# EAGLE board Central_MABOS (EAGLE 9.7.0)
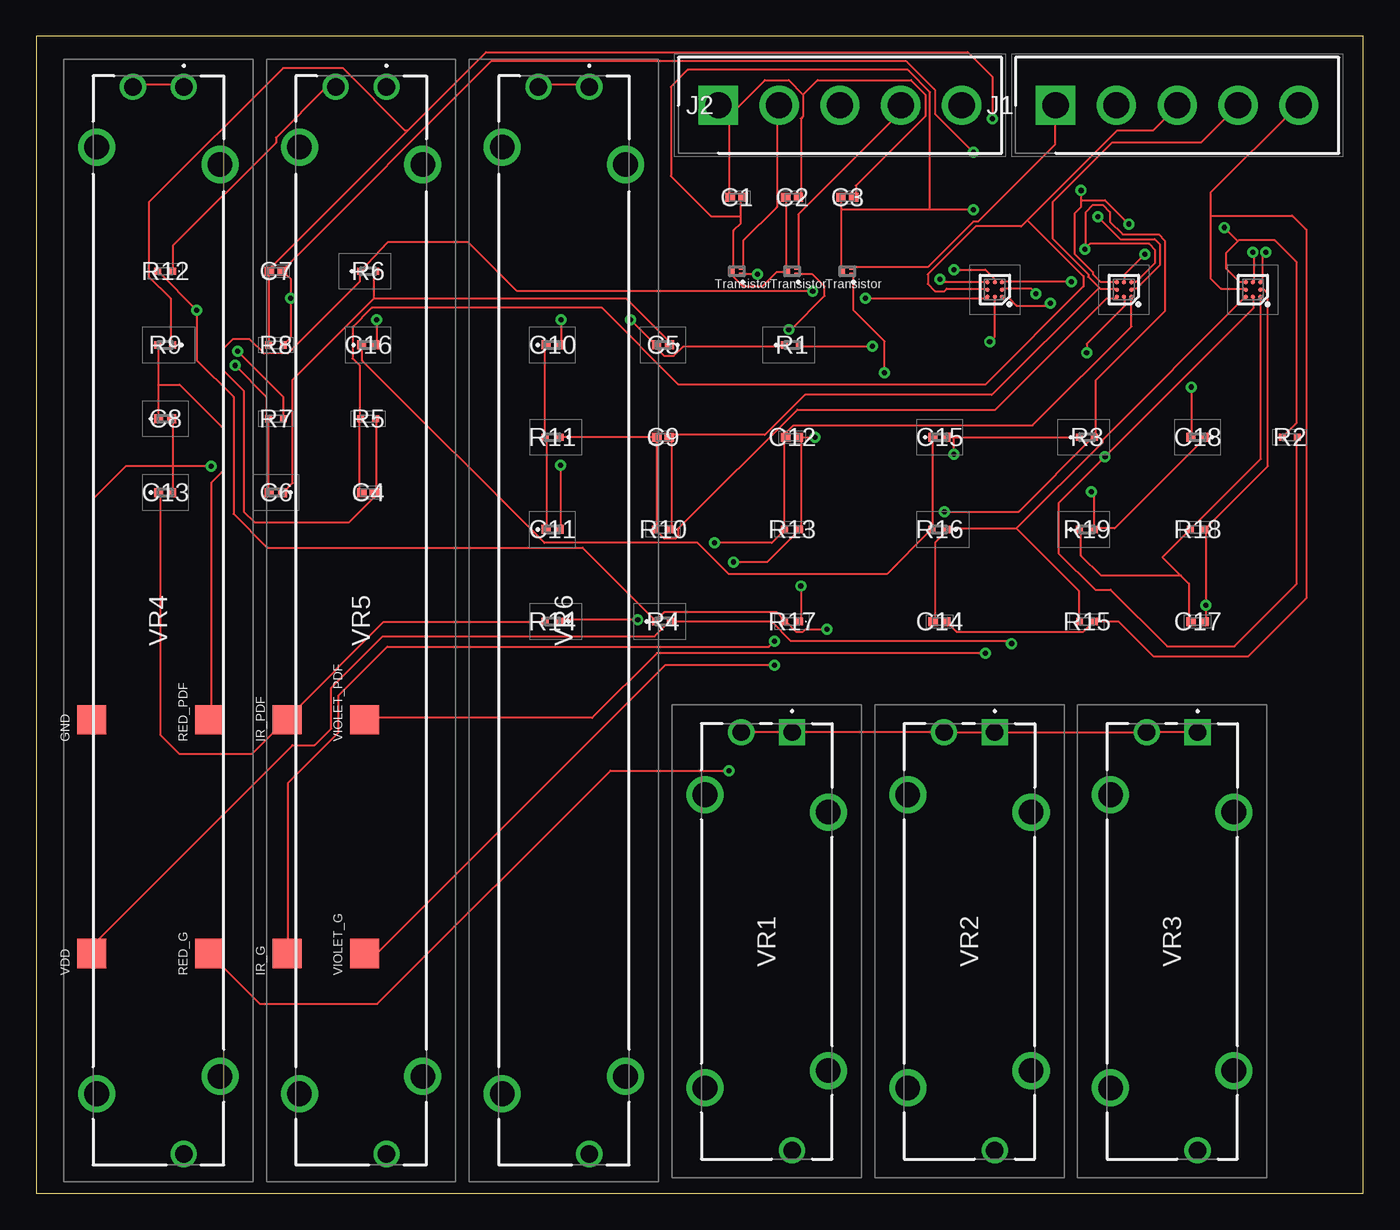
[diagram p0: board, top side]
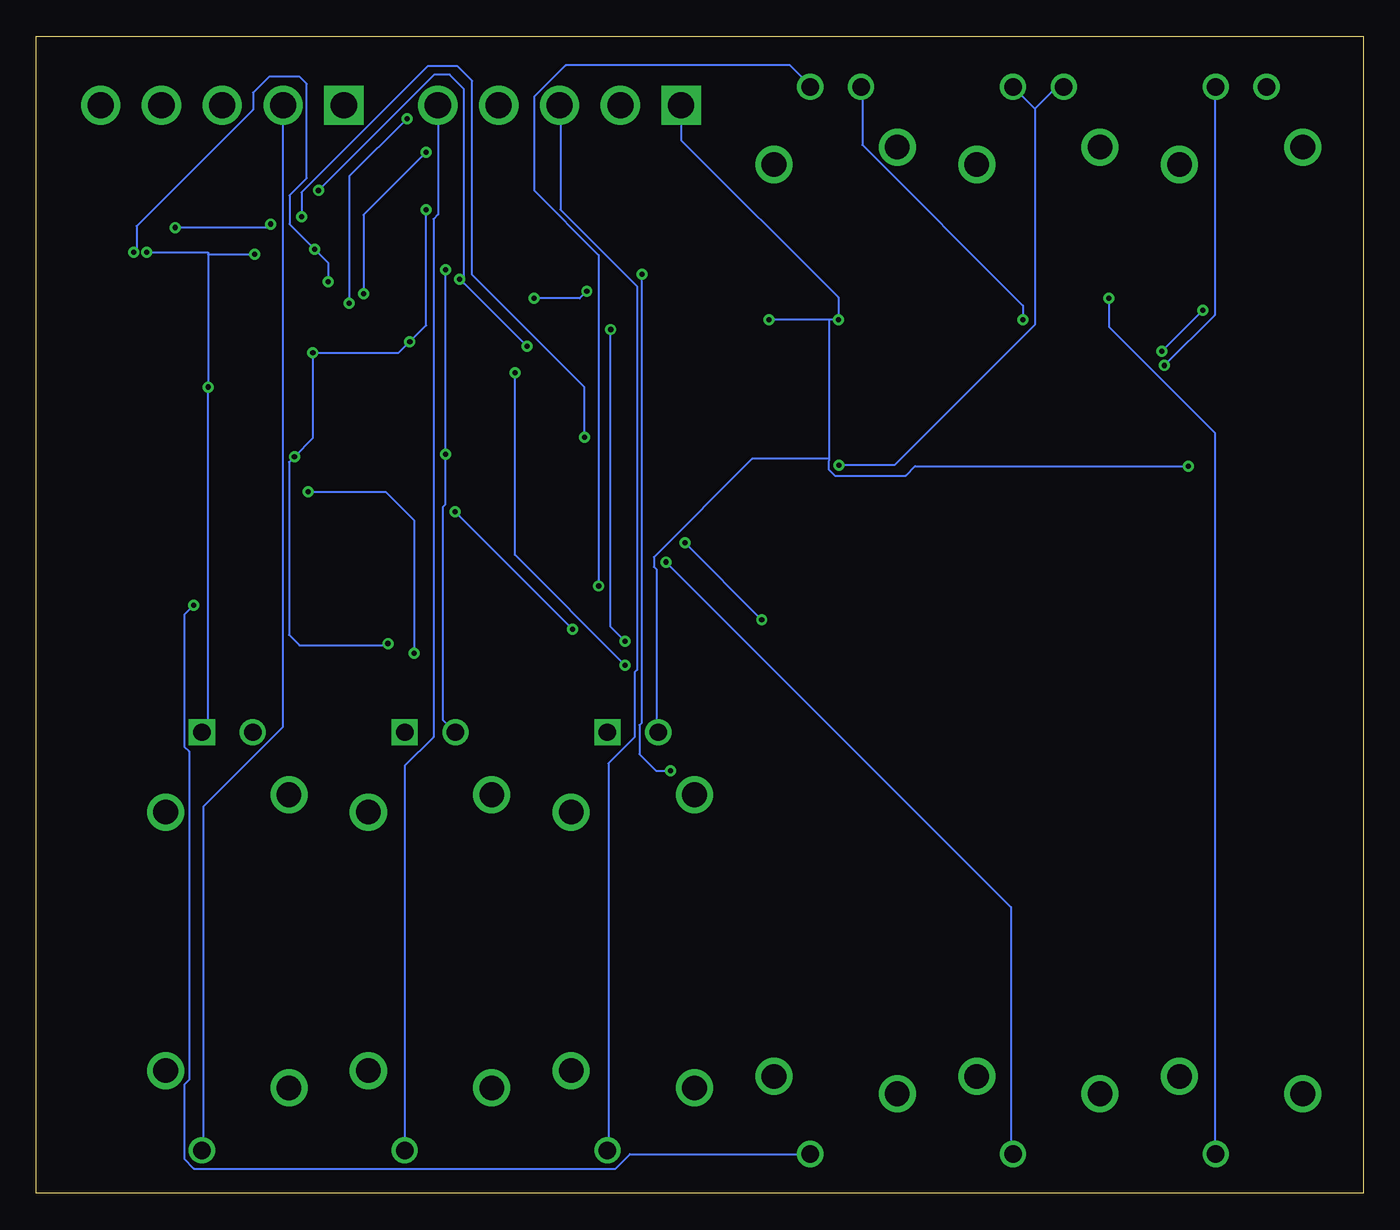
[diagram p1: board, bottom side, seen from below]

Size 91.42 x 79.68 mm. Coordinates in mm from the lower left corner, seen from the top.
Outline: 0,0 91.42,0 91.42,79.68 0,79.68 0,0
Copper layers (1*16): Top 0.035mm / dielectric 1.5mm / Bottom 0.035mm
Design rules "default *": minimum track width 6mil, minimum drill 0.35mm, track to track 7mil, track to pad 8mil, pad to pad 6mil, via to via 6mil, smd to smd 6mil, copper to edge 40mil, drill to drill 6mil, minimum pad ring 10mil, minimum via ring 8mil, stop-mask expansion 4mil, vias tented up to drill 0mil, thermal gap 10mil

## Footprints (pad centres in the part's own frame; a part is rotated, then mirrored left to right if it is on the bottom)
CAPC1005X55N = smd 0.65 x 0.62: 1 -0.44,0; 2 0.44,0
C0402 = smd 0.62 x 0.62: 1 -0.45,0; 2 0.45,0
PAD = smd 2 x 2: PAD 0,0
BGA8C50P3X3_142X142X65 = smd 0.306 x 0.306: A1 -0.5,0.5; A2 0,0.5; A3 0.5,0.5; B1 -0.5,0; B3 0.5,0; C1 -0.5,-0.5; C2 0,-0.5; C3 0.5,-0.5
SHDR5W114P0X419_1X5_2228X658X1 = drill 1.8 pad 2.7 square: 1 0,0 | drill 1.8 pad 2.7: 2 4.19,0; 3 8.38,0; 4 12.57,0; 5 16.76,0
SOT883B = smd 0.4 x 0.25: 1 -0.35,0.225; 2 -0.35,-0.225 | smd 0.4 x 0.7: 3 0.35,0
ERJPA2_(0402) = smd 0.475 x 0.5: 1 -0.512,0; 2 0.512,0
ERJ2RKD1004X = smd 0.475 x 0.5: 1 -0.512,0; 2 0.512,0
POTENTIOMETER = drill 1.2 pad 1.8 square: 1 0,0 | drill 1.2 pad 1.8: 2 0,-3.5; 3 28.8,0 | drill 1.7 pad 2.55: MH1 4.3,-6; MH2 24.5,-6; MH3 23.3,2.5; MH4 5.5,2.5
PTA60432015DPB254 = drill 1.2 pad 1.8: 1 0,0; 2 0,-3.5; 3 73.5,0 | drill 1.7 pad 2.55: MH1 5.35,2.5; MH2 68.15,2.5; MH3 4.15,-6; MH4 69.35,-6

## Placement (x,y rotation side)
C1  CAPACITOR-12PF  [CAPC1005X55N]  48.26,68.58 0 top
C2  CAPACITOR-12PF  [CAPC1005X55N]  52.07,68.58 180 top
C3  CAPACITOR-12PF  [CAPC1005X55N]  55.88,68.58 180 top
C4  CAPACITOR-270PF  [CAPC1005X55N]  22.86,48.26 0 top
C5  CAPACITOR-10µF  [C0402]  43.18,58.42 180 top
C6  CAPACITOR-3.3µF  [C0402]  16.51,48.26 180 top
C7  CAPACITOR-5600PF  [CAPC1005X55N]  16.51,63.5 180 top
C8  CAPACITOR-10µF  [C0402]  8.89,53.34 0 top
C9  CAPACITOR-270PF  [CAPC1005X55N]  43.18,52.07 180 top
C10  CAPACITOR-10µF  [C0402]  35.56,58.42 0 top
C11  CAPACITOR-3.3µF  [C0402]  35.56,45.72 0 top
C12  CAPACITOR-5600PF  [CAPC1005X55N]  52.07,52.07 180 top
C13  CAPACITOR-10µF  [C0402]  8.89,48.26 0 top
C14  CAPACITOR-270PF  [CAPC1005X55N]  62.23,39.37 180 top
C15  CAPACITOR-10µF  [C0402]  62.23,52.07 0 top
C16  CAPACITOR-3.3µF  [C0402]  22.86,58.42 0 top
C17  CAPACITOR-5600PF  [CAPC1005X55N]  80.01,39.37 180 top
C18  CAPACITOR-10µF  [C0402]  80.01,52.07 180 top
GND  PAD  [PAD]  3.81,32.61 90 top
IC1  ADA4505-2  [BGA8C50P3X3_142X142X65]  66.04,62.23 180 top
IC2  ADA4505-2  [BGA8C50P3X3_142X142X65]  74.93,62.23 180 top
IC3  ADA4505-2  [BGA8C50P3X3_142X142X65]  83.82,62.23 180 top
IR_G  PAD  [PAD]  17.27,16.51 90 top
IR_PDF  PAD  [PAD]  17.27,32.61 90 top
J1  5PIN_CONNECTOR  [SHDR5W114P0X419_1X5_2228X658X1]  70.23,74.93 0 top
J2  5PIN_CONNECTOR  [SHDR5W114P0X419_1X5_2228X658X1]  46.99,74.93 0 top
Q1  TRANSISTOR  [SOT883B]  48.26,63.5 180 top
Q2  TRANSISTOR  [SOT883B]  52.07,63.5 180 top
Q3  TRANSISTOR  [SOT883B]  55.88,63.5 180 top
R1  RESISTOR-1.2KOHM  [ERJPA2_(0402)]  52.07,58.42 0 top
R2  RESISTOR-14KOHM  [ERJ2RKD1004X]  86.36,52.07 0 top
R3  RESISTOR-3.3KOHM  [ERJPA2_(0402)]  72.39,52.07 0 top
R4  RESISTOR-3.3KOHM  [ERJPA2_(0402)]  43.18,39.37 0 top
R5  RESISTOR-4.7MOHM  [ERJ2RKD1004X]  22.86,53.34 0 top
R6  RESISTOR-2.7KOHM  [ERJPA2_(0402)]  22.86,63.5 0 top
R7  RESISTOR-56KOHM  [ERJ2RKD1004X]  16.51,53.34 0 top
R8  RESISTOR-4.7MOHM  [ERJ2RKD1004X]  16.51,58.42 180 top
R9  RESISTOR-3.3KOHM  [ERJPA2_(0402)]  8.89,58.42 180 top
R10  RESISTOR-4.7MOHM  [ERJ2RKD1004X]  43.18,45.72 180 top
R11  RESISTOR-2.7KOHM  [ERJPA2_(0402)]  35.56,52.07 180 top
R12  RESISTOR-56KOHM  [ERJ2RKD1004X]  8.89,63.5 180 top
R13  RESISTOR-4.7MOHM  [ERJ2RKD1004X]  52.07,45.72 180 top
R14  RESISTOR-3.3KOHM  [ERJPA2_(0402)]  35.56,39.37 180 top
R15  RESISTOR-4.7MOHM  [ERJ2RKD1004X]  72.39,39.37 180 top
R16  RESISTOR-2.7KOHM  [ERJPA2_(0402)]  62.23,45.72 180 top
R17  RESISTOR-56KOHM  [ERJ2RKD1004X]  52.07,39.37 180 top
R18  RESISTOR-4.7MOHM  [ERJ2RKD1004X]  80.01,45.72 180 top
R19  RESISTOR-3.3KOHM  [ERJPA2_(0402)]  72.39,45.72 0 top
RED_G  PAD  [PAD]  11.94,16.51 90 top
RED_PDF  PAD  [PAD]  11.94,32.61 90 top
VDD  PAD  [PAD]  3.81,16.51 90 top
VIOLET_G  PAD  [PAD]  22.61,16.51 90 top
VIOLET_PDF  PAD  [PAD]  22.61,32.61 90 top
VR1  POTENTIOMETER_5K  [POTENTIOMETER]  52.07,31.75 270 top
VR2  POTENTIOMETER_5K  [POTENTIOMETER]  66.04,31.75 270 top
VR3  POTENTIOMETER_5K  [POTENTIOMETER]  80.01,31.75 270 top
VR4  POTENTIOMETER_250K  [PTA60432015DPB254]  10.16,76.2 270 top
VR5  POTENTIOMETER_250K  [PTA60432015DPB254]  24.13,76.2 270 top
VR6  POTENTIOMETER_250K  [PTA60432015DPB254]  38.1,76.2 270 top

## Library data of the parts
C1-C3 = MABOS_components; DESCRIPTION: Multilayer Ceramic Capacitors MLCC - SMD/SMT 12pF 2% 25V C0G; HEIGHT: 0.55mm; MANUFACTURER_NAME: Kemet; MANUFACTURER_PART_NUMBER: C0402C120G3GACTU; MOUSER_PART_NUMBER: 80-C0402C120G3G; MOUSER_PRICE-STOCK: https://www.mouser.com/Search/Refine.aspx?Keyword=80-C0402C120G3G
C4 C9 C14 = MABOS_components; DESCRIPTION: SMD Comm C0G, Ceramic, 270 pF, 2%, 50 VDC, 125 VDC, 125C, -55C, C0G, SMD, MLCC, Ultra-Stable, Low Loss, Class I, 0.1 % , 100 GOhms, 1.06 mg, 0402, 1mm, 0.5mm, 0.5mm, 0.3mm, 0.3mm, 10000, 78 Weeks, 120; HEIGHT: 0.55mm; MANUFACTURER_NAME: KEMET; MANUFACTURER_PART_NUMBER: C0402C271G5GACTU; MOUSER_PART_NUMBER: 80-C0402C271G5G; MOUSER_PRICE-STOCK: https://www.mouser.com/Search/Refine.aspx?Keyword=80-C0402C271G5G
C5 C8 C10 C13 C15 C18 = MABOS_components; DESCRIPTION: SMD Comm X5R, Ceramic, 10 uF, 20%, 6.3 VDC, 15.75 VDC, 85C, -55C, X5R, SMD, MLCC, Temperature Stable, Class II, 10 % , 10 MOhms, 1.41 mg, 0402, 1mm, 0.5mm, 0.5mm, 0.3mm, 0.3mm, 10000, 78 Weeks, 70; HEIGHT: 0.55mm; MANUFACTURER_NAME: KEMET; MANUFACTURER_PART_NUMBER: C0402C106M9PACTU; MOUSER_PART_NUMBER: 80-C0402C106M9P; MOUSER_PRICE-STOCK: https://www.mouser.co.uk/ProductDetail/KEMET/C0402C106M9PACTU?qs=x4XeXhDQKnp%252Bz0lMlwMC3A%3D%3D
C6 C11 C16 = MABOS_components; DESCRIPTION: SMD Comm X5R, Ceramic, 3.3 uF, 20%, 4 VDC, 10 VDC, 85C, -55C, X5R, SMD, MLCC, Temperature Stable, Class II, 10 % , 30.3 MOhms, 1.21 mg, 0402, 1mm, 0.5mm, 0.5mm, 0.3mm, 0.3mm, 10000, 78 Weeks, 70; HEIGHT: 0.55mm; MANUFACTURER_NAME: KEMET; MANUFACTURER_PART_NUMBER: C0402C335M7PACTU; MOUSER_PART_NUMBER: 80-C0402C335M7P; MOUSER_PRICE-STOCK: https://www.mouser.co.uk/ProductDetail/KEMET/C0402C335M7PACTU?qs=K%2Fj%2Fqf%252B0fqJuKSSbbJXSEQ%3D%3D
C7 C12 C17 = MABOS_components; DESCRIPTION: SMD Comm X7R, Ceramic, 5600 pF, 5%, 16 VDC, 40 VDC, 125C, -55C, X7R, SMD, MLCC, Temperature Stable, Class II, 3.5 % , 100 GOhms, 1.21 mg, 0402, 1mm, 0.5mm, 0.5mm, 0.3mm, 0.3mm, 10000, 78 Weeks, 80; HEIGHT: 0.55mm; MANUFACTURER_NAME: KEMET; MANUFACTURER_PART_NUMBER: C0402C562J4RACTU; MOUSER_PART_NUMBER: 80-C0402C562J4R; MOUSER_PRICE-STOCK: https://www.mouser.co.uk/ProductDetail/KEMET/C0402C562J4RACTU?qs=YJD0VjdmSUns5e35Blws8w%3D%3D
GND IR_G IR_PDF RED_G RED_PDF VDD VIOLET_G VIOLET_PDF = Nordic_BLE
IC1-IC3 = MABOS_components; DESCRIPTION: ANALOG DEVICES - ADA4505-2ACBZ-R7 - OP-AMP, DUAL, 50KHZ, WLCSP-8; HEIGHT: 0.65mm; MANUFACTURER_NAME: Analog Devices; MANUFACTURER_PART_NUMBER: ADA4505-2ACBZ-R7; MOUSER_PART_NUMBER: 584-ADA4505-2ACBZ-R7; MOUSER_PRICE-STOCK: https://www.mouser.co.uk/ProductDetail/Analog-Devices/ADA4505-2ACBZ-R7?qs=BpaRKvA4VqEsLtXU3NSLDQ%3D%3D
J1 J2 = MABOS_components; DESCRIPTION: Samtec IPBT, 4.19mm Pitch, 5 Way, 1 Row PCB Terminal Block Header, Through Hole; HEIGHT: 10.29mm; MANUFACTURER_NAME: SAMTEC; MANUFACTURER_PART_NUMBER: IPBT-105-H1-T-S-K; MOUSER_PART_NUMBER: 200-IPBT105H1TSK; MOUSER_PRICE-STOCK: https://www.mouser.co.uk/ProductDetail/Samtec/IPBT-105-H1-T-S-K?qs=PB6%2FjmICvI0oo3MGzaPD2A%3D%3D
Q1-Q3 = MABOS_components; DESCRIPTION: Bipolar Transistors - BJT 45V NPN 100mA 250mW; HEIGHT: mm; MANUFACTURER_NAME: Nexperia; MANUFACTURER_PART_NUMBER: BC847BMB,315; MOUSER_PART_NUMBER: 771-BC847BMB315; MOUSER_PRICE-STOCK: https://www.mouser.co.uk/ProductDetail/Nexperia/BC847BMB315?qs=5C9Q4QJFsuN7bUmIcU4LYw%3D%3D
R1 = MABOS_components; DESCRIPTION: Anti-Surge Thick Film Chip Resistor, 0402, 0.2W; HEIGHT: 0.4mm; MANUFACTURER_NAME: Panasonic; MANUFACTURER_PART_NUMBER: ERJ-PA2D1201X; MOUSER_PART_NUMBER: 667-ERJ-PA2D1201X; MOUSER_PRICE-STOCK: https://www.mouser.com/Search/Refine.aspx?Keyword=667-ERJ-PA2D1201X
R2 = MABOS_components; DESCRIPTION: Panasonic ERJ2RK Series Thick Film Resistor 14k +/-1% 0.1W +/-100ppm/C; HEIGHT: 0.4mm; MANUFACTURER_NAME: Panasonic; MANUFACTURER_PART_NUMBER: ERJ-2RKF1402X; MOUSER_PART_NUMBER: 667-ERJ-2RKF1402X; MOUSER_PRICE-STOCK: https://www.mouser.com/Search/ProductDetail.aspx?qs=MVjVSMjNRMrMgFTFLdW36A%3d%3d
R3 R4 R9 R14 R19 = MABOS_components; DESCRIPTION: Anti-Surge Thick Film Chip Resistor, 0402, 0.2W; HEIGHT: 0.4mm; MANUFACTURER_NAME: Panasonic; MANUFACTURER_PART_NUMBER: ERJ-PA2F3301X; MOUSER_PART_NUMBER: 667-ERJ-PA2F3301X; MOUSER_PRICE-STOCK: https://www.mouser.com/Search/Refine.aspx?Keyword=667-ERJ-PA2F3301X
R5 R8 R10 R13 R15 R18 = MABOS_components; DESCRIPTION: Panasonic ERJ2GEJ Series Thick Film Surface Mount Fixed Resistor 0402 Case 4.7M +/-5% 0.1W -400 +150ppm/C; HEIGHT: 0.4mm; MANUFACTURER_NAME: Panasonic; MANUFACTURER_PART_NUMBER: ERJ-2GEJ475X; MOUSER_PART_NUMBER: 667-ERJ-2GEJ475X; MOUSER_PRICE-STOCK: https://www.mouser.com/Search/Refine.aspx?Keyword=667-ERJ-2GEJ475X
R6 R11 R16 = MABOS_components; DESCRIPTION: Anti-Surge Thick Film Chip Resistor, 0402, 0.2W; HEIGHT: 0.4mm; MANUFACTURER_NAME: Panasonic; MANUFACTURER_PART_NUMBER: ERJ-PA2F2701X
R7 R12 R17 = MABOS_components; DESCRIPTION: Precision Thick Film Chip Resistor, 0402, 0.063W; HEIGHT: 0.4mm; MANUFACTURER_NAME: Panasonic; MANUFACTURER_PART_NUMBER: ERJ-2RKF5602X; MOUSER_PART_NUMBER: 667-ERJ-2RKF5602X; MOUSER_PRICE-STOCK: https://www.mouser.com/Search/Refine.aspx?Keyword=667-ERJ-2RKF5602X
VR1-VR3 = MABOS_components; DESCRIPTION: SLIDE POT 5K OHM TOP 15MM - Through Hole Slide Potentiometer Top Adjustment Type SLIDE POT 5K OHM TOP 15MM; HEIGHT: 17mm; MANUFACTURER_NAME: TT Electronics; MANUFACTURER_PART_NUMBER: PS15-10PC1BR5K; MOUSER_PART_NUMBER: 858-PS1510PC1BR5K; MOUSER_PRICE-STOCK: https://www.mouser.co.uk/ProductDetail/BI-Technologies-TT-Electronics/PS15-10PC1BR5K/?qs=1MXlzafEN399P50A%252By84yQ%3D%3D
VR4-VR6 = MABOS_components; DESCRIPTION: Slide Potentiometers 250K LINEAR; HEIGHT: 21.5mm; MANUFACTURER_NAME: Bourns; MANUFACTURER_PART_NUMBER: PTA6043-2015DPB254; MOUSER_PART_NUMBER: 652-PTA6432015DPB254; MOUSER_PRICE-STOCK: https://www.mouser.co.uk/ProductDetail/Bourns/PTA6043-2015DPB254?qs=JCQZbRdZgKbjH0wkhhYAqQ%3D%3D

## Nets
+IN_A_DIV: IC1.C3 IC2.C3 IC3.C3 R1.2 R2.1
+IN_B_DIV: IC1.C1 IC2.C1 IC3.C1 R3.2 R4.1 R7.2 R12.2 R17.2
-IN_B_IR: C12.1 IC2.B1 R13.1 VR5.3
-IN_B_RED: C7.1 IC1.B1 R8.1 VR4.3
-IN_B_VIOLET: C17.1 IC3.B1 R18.1 VR6.3
GND: C1.1 C2.1 C3.1 C5.2 C8.2 C10.2 C13.2 C15.2 C18.2 GND.PAD IC1.C2 IC2.C2 IC3.C2 J2.1 R1.1 R3.1 VR1.1 VR1.2 VR2.1 VR2.2 VR3.1 VR3.2
IR_G: IR_G.PAD Q2.1
IR_IN: J2.5 VR2.3
IR_OUT: J2.4 Q2.2
IR_OUT_A: C9.2 IC2.A3 R10.2 R11.1
IR_OUT_B: C12.2 IC2.A1 R13.2 R14.1
IR_PD: C9.1 IC2.B3 J1.4 R10.1
IR_PDF: C13.1 IR_PDF.PAD R14.2
N$3: C5.1 C6.1 R6.2
N$4: C6.2 R7.1 VR4.1 VR4.2
N$13: C10.1 C11.1 R11.2
N$14: C11.2 R12.1 VR5.1 VR5.2
N$23: C15.1 C16.1 R16.2
N$24: C16.2 R17.1 VR6.1 VR6.2
RED_G: Q1.1 RED_G.PAD
RED_IN: J2.3 VR1.3
RED_OUT: J2.2 Q1.2
RED_OUT_A: C4.2 IC1.A3 R5.2 R6.1
RED_OUT_B: C7.2 IC1.A1 R8.2 R9.1
RED_PD: C4.1 IC1.B3 J1.3 R5.1
RED_PDF: C8.1 R9.2 RED_PDF.PAD
VDD: C1.2 C2.2 C3.2 IC1.A2 IC2.A2 IC3.A2 Q1.3 Q2.3 Q3.3 R2.2 R4.2 VDD.PAD
VIOLET_G: Q3.1 VIOLET_G.PAD
VIOLET_IN: J1.2 VR3.3
VIOLET_OUT: J1.1 Q3.2
VIOLET_OUT_A: C14.2 IC3.A3 R15.2 R16.1
VIOLET_OUT_B: C17.2 IC3.A1 R18.2 R19.1
VIOLET_PD: C14.1 IC3.B3 J1.5 R15.1
VIOLET_PDF: C18.1 R19.2 VIOLET_PDF.PAD

## Tracks (layer width: path | path; a pad name or v marks a point on that pad's centre or on a via)
+IN_A_DIV  (via drill 0.35)
  Top 0.152: 82.79,65.57 82.84,65.62 85.33,65.62 86.83,64.12 86.83,53.05 R2.1 | 82.79,65.57 81.97,64.75 81.97,63.7 82.88,62.79 83.21,62.79 IC3.C3 | v62.24,62.95 62.41,62.79 65.55,62.79 IC1.C3 | v57.62,58.33 52.67,58.33 R1.2 | v71.98,69.06 71.98,68.4 | IC2.C3 74.3,62.79 73.3,62.79 72.81,63.28 72.81,63.44 71.53,64.72 71.53,67.46 71.98,67.92 71.98,68.4 | v81.85,66.51 82.79,65.57 | v75.29,66.75 73.64,68.4 71.98,68.4
  Bottom 0.152: v57.62,58.33 61.95,62.66 | 61.95,62.66 61.95,76.05 62.94,77.04 64.01,77.04 v71.98,69.06 | 61.95,62.66 v62.24,62.95 | v81.85,66.51 75.53,66.51 v75.29,66.75
+IN_B_DIV  (via drill 0.35)
  Top 0.152: v71.32,62.79 66.53,62.79 IC1.C1 | IC2.C1 75.45,62.79 75.78,62.79 77.09,64.09 77.09,64.96 76.67,65.38 72.6,65.38 v72.24,65.01 72.31,65.09 72.31,67.58 72.81,68.07 73.47,68.07 73.97,67.58 73.97,66.92 74.84,66.04 77.33,66.04 77.75,65.62 77.75,60.73 72.97,55.96 72.97,52.22 R3.2 72.81,52.06 67.69,46.94 v62.57,46.94 | v13.87,58 17,54.86 17,53.38 R7.2 | R12.2 8.42,63.45 v11.06,60.81 11.06,57.37 13.59,54.84 13.59,46.79 15.91,44.46 37.64,44.46 42.6,39.51 R4.1 42.76,39.51 43.26,40 51.02,40 51.51,39.51 R17.2 51.68,39.34 52.34,38.68 52.83,38.68 53,38.85 v54.48,38.85 | v84.72,64.8 84.52,64.59 84.52,62.93 IC3.C1
  Bottom 0.152: v71.32,62.79 71.32,64.1 v72.24,65.01 73.97,66.74 73.97,68.73 72.79,69.91 72.79,76.41 73.29,76.91 75.37,76.91 76.49,75.79 76.49,74.62 84.52,66.6 84.52,65 v84.72,64.8 | v11.06,60.81 v13.87,58 | v54.48,38.85 v62.57,46.94
-IN_B_IR  (via drill 0.35)
  Top 0.152: v73.14,67.25 74.68,65.71 77.06,65.71 77.42,65.35 77.42,63.93 75.78,62.29 75.45,62.29 IC2.B1 | 52.67,52.06 v53.66,52.06 | 52.67,52.06 52.67,45.78 R13.1 52.5,45.62 50.35,43.47 v48.04,43.47 | 52.67,52.06 C12.1
  Bottom 0.152: v53.66,52.06 53.66,55.52 61.38,63.25 61.38,76.61 62.4,77.62 64.44,77.62 73.14,68.93 v73.14,67.25 | v48.04,43.47 24.27,19.7 24.27,2.86 VR5.3
-IN_B_RED  (via drill 0.35)
  Top 0.152: v68.87,61.96 68.54,62.29 66.53,62.29 IC1.B1 | v64.55,71.7 61.91,74.35 61.91,76 59.92,77.99 31.38,77.99 17,63.61 C7.1 17.51,62.98 v17.51,61.65 17.51,58.91 R8.1
  Bottom 0.152: v68.87,61.96 68.87,67.39 v64.55,71.7 | v17.51,61.65 17.51,59.66 10.24,52.39 10.24,2.86 VR4.3
-IN_B_VIOLET  (via drill 0.35)
  Top 0.152: IC3.B1 84.37,62.29 84.53,62.29 84.86,61.96 84.86,50.08 80.57,45.78 R18.1 80.57,45.62 v80.57,40.5 80.57,39.51 C17.1
  Bottom 0.152: v80.57,40.5 81.23,39.84 81.23,30.76 80.9,30.43 80.9,7.81 81.23,7.48 81.23,2.36 80.57,1.7 51.51,1.7 50.52,2.69 38.14,2.69 VR6.3
GND  (via drill 0.35)
  Top 0.152: v76.38,64.67 74.95,63.25 74.95,62.79 IC2.C2 | v83.81,64.8 83.87,64.73 83.87,62.79 IC3.C2 | v79.58,55.52 79.58,52.22 C18.2 | VR3.1 VR3.2 VR2.1 VR2.2 VR1.1 VR1.2 | 63.23,52.06 62.74,52.06 C15.2 | 63.23,52.06 71.82,52.06 R3.1 | IC1.C2 66.04,62.95 65.38,63.61 v63.23,63.61 | v63.23,50.9 63.23,52.06 | 9.41,50.08 9.41,53.21 C8.2 | 9.41,50.08 9.41,50.06 | 9.41,50.06 9.41,48.26 C13.2 | 9.41,50.06 6.15,50.06 3.96,47.88 3.96,32.74 GND.PAD | R1.1 51.51,58.33 44.58,58.33 43.92,57.67 43.26,57.67 42.6,58.33 C5.2 42.6,58.5 v40.95,60.15 | v36.16,60.15 36.16,58.5 C10.2 | 47.71,74.18 47.71,68.73 C1.1 | 47.71,74.18 47.05,74.84 J2.1 47.71,74.18 | 52.83,75.67 52.83,74.18 52.67,74.02 52.67,68.73 C2.1 | 52.83,75.67 51.84,76.66 50.19,76.66 47.71,74.18 | 52.83,75.67 53.82,76.66 60.26,76.66 61.25,75.67 61.25,74.18 56.46,69.39 56.46,68.73 C3.1 | v12.05,50.08 9.41,50.08
  Bottom 0.152: v83.81,64.8 79.58,64.8 79.58,64.67 | 79.58,64.67 v76.38,64.67 | 79.58,64.67 v79.58,55.52 79.58,32.08 79.91,31.75 VR3.1 | v63.23,63.61 v63.23,50.9 63.23,47.43 63.4,47.27 63.4,32.58 62.57,31.75 VR2.2 | J2.1 46.99,72.53 36.16,61.7 v36.16,60.15 36.82,60.15 | 36.82,60.15 v40.95,60.15 | 36.82,60.15 36.82,50.57 | 36.82,50.57 42.1,50.57 48.87,43.8 48.87,43.14 48.7,42.98 48.7,31.75 VR1.2 | v12.05,50.08 30.88,50.08 31.52,49.43 36.41,49.43 36.83,49.85 36.83,50.43 36.82,50.44 36.82,50.57
IR_G  (via drill 0.35)
  Top 0.152: v51.84,59.49 52.01,59.49 54.32,61.8 54.32,62.46 53.49,63.28 52.5,63.28 Q2.1 | v50.85,38.02 50.47,37.64 24.18,37.64 20.83,34.29 20.83,31.75 17.34,28.26 17.34,16.56 IR_G.PAD
  Bottom 0.152: v51.84,59.49 51.84,39.01 v50.85,38.02
IR_IN
  Bottom 0.152: VR2.3 66.04,29.44 64.06,31.42 64.06,67.08 63.73,67.41 63.73,74.84 J2.5
IR_OUT
  Top 0.152: Q2.2 52.5,63.78 52.5,67.41 59.44,74.35 59.44,74.84 J2.4
IR_OUT_A
  Top 0.152: R11.1 36.16,52.06 42.6,52.06 C9.2 42.76,52.06 42.76,45.78 R10.2 42.76,45.62 43.26,45.12 44.08,45.12 44.25,45.29 44.25,45.78 52.44,53.97 66.09,53.97 73.75,61.63 74.46,61.63 IC2.A3
IR_OUT_B  (via drill 0.35)
  Top 0.152: v41.44,39.51 36.16,39.51 R14.1 | v46.72,44.79 50.69,44.79 51.51,45.62 R13.2 51.51,45.78 51.51,52.06 C12.2 51.51,52.22 52.17,52.88 68.64,52.88 75.45,59.69 75.45,61.63 IC2.A1
  Bottom 0.152: v46.72,44.79 v41.44,39.51
IR_PD
  Top 0.152: R10.1 43.75,45.78 43.75,52.06 C9.1 43.75,52.22 50.19,52.22 52.95,54.98 65.84,54.98 73.23,62.37 | 73.23,62.37 72.48,63.12 72.48,63.3 70.02,65.77 70.02,68.25 74.12,72.35 80.23,72.35 82.72,74.84 J1.4 | 73.23,62.37 73.3,62.29 74.3,62.29 IC2.B3
IR_PDF
  Top 0.152: R14.2 35,39.34 23.94,39.34 17.34,32.74 IR_PDF.PAD 17.17,32.58 14.83,30.24 9.88,30.24 8.59,31.53 8.59,48.26 C13.1
N$3
  Top 0.152: 23.28,61.63 23.28,63.45 R6.2 | 23.28,61.63 17.67,56.02 17.67,48.92 17,48.26 C6.1 | 23.28,61.63 40.62,61.63 43.59,58.66 43.59,58.5 C5.1
N$4  (via drill 0.35)
  Top 0.152: C6.2 16.02,48.26 16.02,53.21 R7.1 15.85,53.38 15.85,54.86 v13.7,57.01 | VR4.2 6.77,76.33 10.07,76.33 VR4.1
  Bottom 0.152: v13.7,57.01 10.24,60.48 10.24,76.16 VR4.1
N$13
  Top 0.152: C10.1 35,58.33 35,52.22 R11.2 35.17,52.06 35.17,45.78 C11.1
N$14  (via drill 0.35)
  Top 0.152: R12.1 9.41,63.61 9.41,65.27 16.51,72.37 16.51,72.7 19.98,76.16 20.47,76.16 VR5.2 | v36.12,50.14 36.12,45.83 C11.2
  Bottom 0.152: v36.12,50.14 32.3,50.14 22.62,59.82 22.62,74.68 | 22.62,74.68 24.11,76.16 VR5.1 | 22.62,74.68 21.13,76.16 20.64,76.16 VR5.2
N$23
  Top 0.152: C15.1 61.75,52.06 61.75,45.78 R16.2 61.58,45.62 58.61,42.65 47.71,42.65 45.57,44.79 35,44.79 22.45,57.34 22.45,58.33 C16.1
N$24  (via drill 0.35)
  Top 0.152: v23.44,60.15 23.44,58.5 C16.2 | v52.67,41.82 52.67,39.51 R17.1 | VR6.2 34.67,76.33 37.97,76.33 VR6.1
  Bottom 0.152: v23.44,60.15 23.44,61.14 34.51,72.2 34.51,76.16 VR6.2 | v52.67,41.82 52.67,64.61 57.12,69.06 57.12,75.5 54.95,77.67 39.48,77.67 38.14,76.33 VR6.1
RED_G  (via drill 0.35)
  Top 0.152: v49.7,63.28 48.7,63.28 Q1.1 | v47.71,29.11 39.55,29.11 23.48,13.04 15.4,13.04 RED_G.PAD
  Bottom 0.152: v49.7,63.28 49.7,32.41 49.86,32.24 49.86,30.24 48.73,29.11 v47.71,29.11
RED_IN
  Bottom 0.152: VR1.3 52.01,3.02 52.01,29.6 50.19,31.42 50.19,35.88 50.02,36.04 50.02,62.46 55.31,67.74 55.31,74.84 J2.3
RED_OUT
  Top 0.152: Q1.2 48.7,63.78 48.7,65.59 51.02,67.91 51.02,74.84 J2.2
RED_OUT_A  (via drill 0.35)
  Top 0.152: R5.2 23.44,53.21 23.44,48.26 C4.2 23.28,48.26 23.28,47.93 21.55,46.2 15.05,46.2 14.3,46.95 14.3,55.26 12.88,56.68 12.88,58.17 13.54,58.83 14.69,58.83 15.68,57.84 17.34,57.84 22.29,62.79 22.29,63.45 R6.1 24.21,65.51 29.74,65.51 33.12,62.13 v53.49,62.13 | v57.12,61.63 65.55,61.63 IC1.A3
  Bottom 0.152: v57.12,61.63 53.99,61.63 v53.49,62.13
RED_OUT_B  (via drill 0.35)
  Top 0.152: v69.86,61.29 69.71,61.14 67.53,61.14 67.03,61.63 66.53,61.63 IC1.A1 | 25.59,73.19 16.02,63.61 C7.2 16.02,63.45 16.02,58.5 R8.2 | 25.59,73.19 25.43,73.19 21.13,77.48 17,77.48 7.76,68.24 7.76,63.12 9.25,61.63 9.25,58.5 R9.1 | 25.59,73.19 30.99,78.59 64.17,78.59 65.88,76.89 v65.88,74.02
  Bottom 0.152: v69.86,61.29 69.86,70.03 v65.88,74.02
RED_PD
  Top 0.152: C4.1 22.29,48.26 22.29,53.21 R5.1 22.29,53.38 22.29,57.01 21.79,57.51 21.79,59.65 23.11,60.97 38.96,60.97 44.25,55.69 65.38,55.69 72.15,62.46 72.15,63.16 68.29,67.02 | 68.29,67.02 74.46,73.19 76.94,73.19 78.59,74.84 J1.3 | 68.29,67.02 67.86,66.59 64.72,66.59 61.42,63.28 61.42,62.62 61.91,62.13 62.57,62.13 62.74,62.29 65.55,62.29 IC1.B3
RED_PDF
  Top 0.152: 8.42,55.69 8.42,53.38 C8.1 | 8.42,55.69 8.42,58.33 R9.2 | 8.42,55.69 9.87,55.69 12.88,52.68 12.88,49.75 12.05,48.92 12.05,32.74 RED_PDF.PAD
VDD  (via drill 0.35)
  Top 0.152: 3.96,16.89 3.96,16.56 VDD.PAD 3.81,17.02 17.65,30.86 19.18,30.86 20.32,32 20.32,34.8 23.88,38.35 42.6,38.35 43.59,39.34 R4.2 43.75,39.34 50.69,39.34 52.01,38.02 67.03,38.02 v67.2,37.86 | C2.2 51.68,68.57 51.68,63.61 Q2.3 51.68,63.45 51.02,63.45 50.02,62.46 48.7,62.46 48.04,63.12 48.04,63.45 Q1.3 48.04,63.61 48.04,66.32 48.54,66.81 48.54,67.27 | 48.54,67.27 48.54,68.57 C1.2 | 55.47,67.74 55.47,63.61 Q3.3 | 55.47,67.74 55.47,68.57 C3.2 | IC1.A2 66.04,59 v65.68,58.65 | v72.36,57.89 72.36,58.5 74.95,61.09 74.95,61.63 IC2.A2 | IC3.A2 83.87,61.63 83.87,60.97 v73.64,50.74 70.43,47.54 70.43,44.08 72.95,41.57 74.02,41.57 77.92,37.67 82.55,37.67 86.84,41.96 86.84,52.06 R2.2 | v64.55,67.74 61.58,67.74 | 61.58,67.74 55.47,67.74 | 48.54,67.27 46.49,67.27 43.71,70.05 43.71,76.2 44.88,77.37 60.05,77.37 61.58,75.83 61.58,67.74
  Bottom 0.152: v64.55,67.74 64.55,59.78 v65.68,58.65 66.45,57.89 v72.36,57.89 72.36,52.01 v73.64,50.74 74.02,50.36 74.02,38.46 73.29,37.73 67.32,37.73 v67.2,37.86
VIOLET_G  (via drill 0.35)
  Top 0.152: v58.45,56.51 58.45,58.66 56.3,60.81 56.3,63.28 Q3.1 | v50.85,36.37 43.32,36.37 23.46,16.51 VIOLET_G.PAD
  Bottom 0.152: v58.45,56.51 58.45,43.97 v50.85,36.37
VIOLET_IN
  Bottom 0.152: VR3.3 79.91,3.02 79.91,26.63 74.46,32.08 74.46,74.84 J1.2
VIOLET_OUT
  Top 0.152: Q3.2 56.3,63.78 61.42,63.78 64.55,66.92 64.88,66.92 70.17,72.2 70.17,74.84 J1.1
VIOLET_OUT_A
  Top 0.152: 67.53,45.78 73.47,51.73 73.47,51.89 83.21,61.63 IC3.A3 | 67.53,45.78 62.9,45.78 R16.1 62.74,45.62 61.91,44.79 61.91,39.51 C14.2 | 67.53,45.78 71.82,41.49 71.82,39.51 R15.2
VIOLET_OUT_B
  Top 0.152: IC3.A1 84.37,61.63 84.37,50.57 79.58,45.78 R18.2 79.41,45.62 77.6,43.8 78.87,42.53 | 78.87,42.53 73.37,42.53 71.98,43.92 71.98,45.62 R19.1 | 78.87,42.53 79.41,41.99 79.41,39.51 C17.2
VIOLET_PD
  Top 0.152: C14.1 62.74,39.34 63.4,38.68 72.15,38.68 72.81,39.34 R15.1 72.97,39.34 74.6,39.34 76.99,36.96 83.48,36.96 87.5,40.98 87.5,66.36 86.53,67.34 80.9,67.34 | 80.9,67.34 80.9,68.9 86.84,74.84 J1.5 | 80.9,67.34 80.9,63.01 81.61,62.29 83.21,62.29 IC3.B3
VIOLET_PDF  (via drill 0.35)
  Top 0.152: C18.1 80.57,52.06 74.3,45.78 72.97,45.78 R19.2 72.9,48.09 v72.68,48.31 | v65.38,37.2 42.76,37.2 38.3,32.74 22.62,32.74 VIOLET_PDF.PAD
  Bottom 0.152: v72.68,48.31 67.35,48.31 65.38,46.34 v65.38,37.2